# Altium PCB BMS_Rev4.PcbDoc (part 3 of 3)
Units mm, origin at the board's own origin, x right, y up, seen from the top; angles counter-clockwise.
Board outline 63.88 x 34.7 mm, 2 copper layers (Top Layer, Bottom Layer); 62 components, 39 nets, 215 pads, 192 vias.
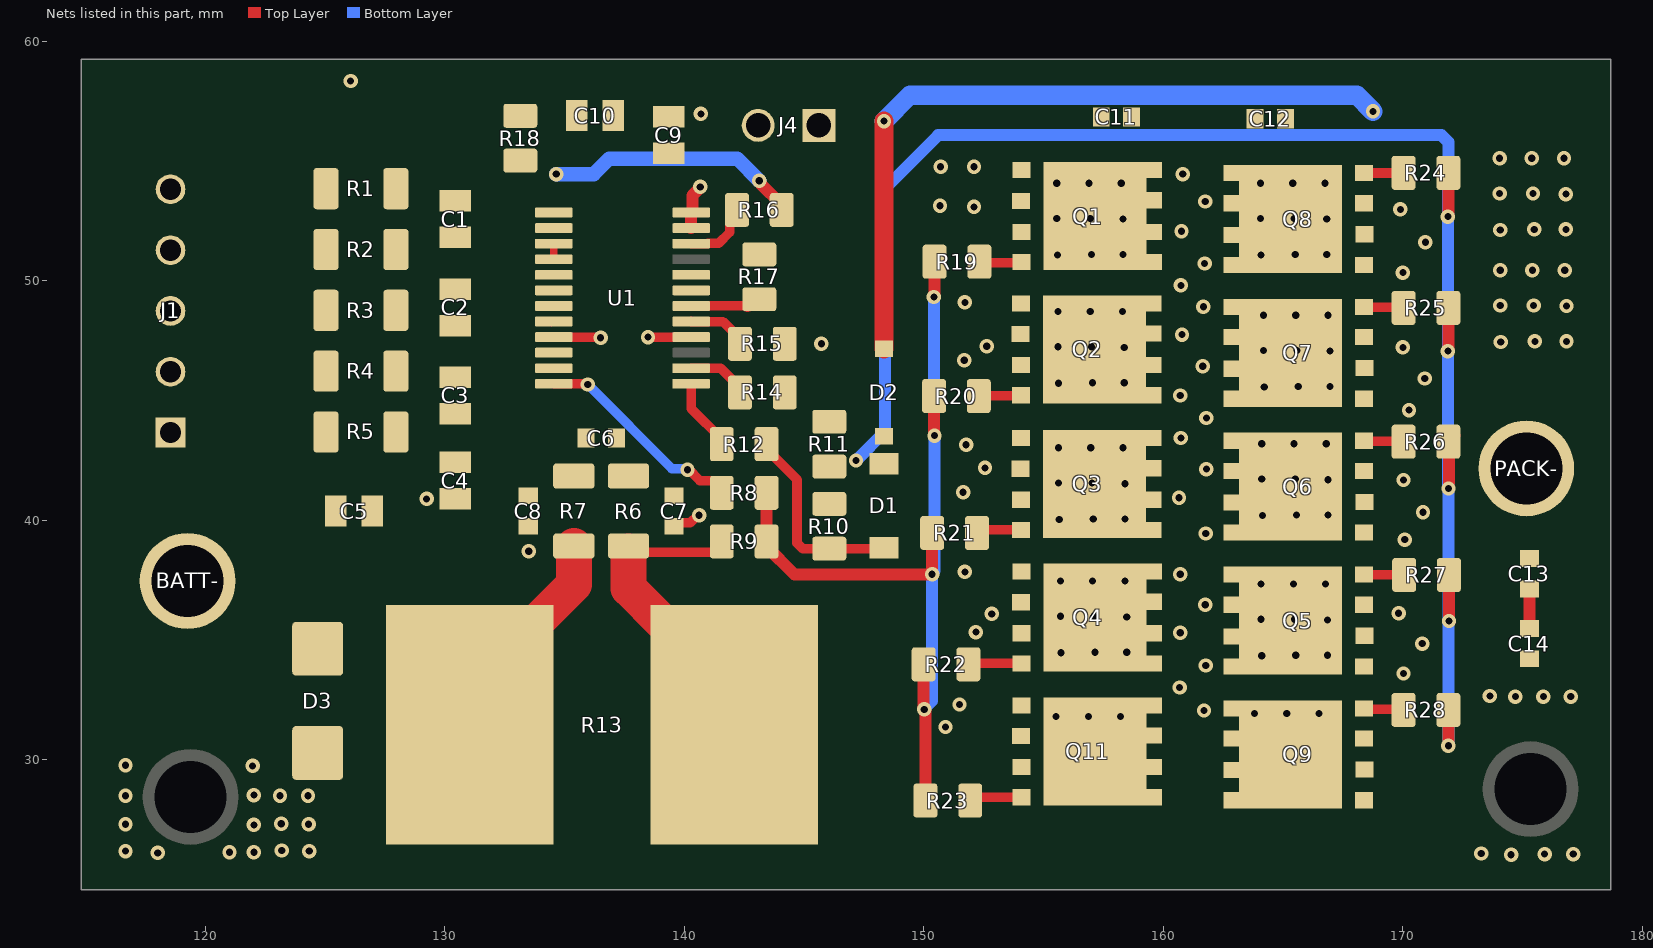
[diagram p2: the nets of this part, all layers, seen from the top]

## Polygon pours and split planes (outlines as drawn) (continued)
NetJ1_4 on Top Layer "NETJ1_4_L01_P029" (solid, pour order 29): 116.942,52.197 cw(c117.003,52.136) 117.003,52.222 125.781,52.222 cw(c125.781,51.487) 126.301,52.007 126.34,51.968 126.34,51.083 cw(c125.472,51.083) 126.086,50.47 cw(c125.963,50.592) 125.963,50.419 116.967,50.419 116.967,52.237 ccw(c116.88,52.237) 116.942,52.299
NetJ1_5 on Top Layer "NETJ1_5_L01_P028" (solid, pour order 28): 116.965,54.762 cw(c117.026,54.701) 117.026,54.788 125.804,54.788 cw(c125.804,54.052) 126.324,54.572 126.363,54.534 126.363,53.648 cw(c125.496,53.648) 126.109,53.035 cw(c125.986,53.158) 125.986,52.984 116.99,52.984 116.99,54.803 ccw(c116.903,54.803) 116.965,54.864
BATT+ on Top Layer "BATT+_L01_P020" (solid, pour order 20): 177.597,34.62 174.422,34.62 172.796,32.995 172.796,25.527 177.597,25.527
BATT+ on Top Layer "BATT+_L01_P026" (solid, pour order 26): 127.406,55.728 127.455,55.776 129.273,55.776 ccw(c128.853,55.882) 129.286,55.882 129.286,56.566 131.122,56.566 cw(c131.122,55.786) 131.674,56.337 131.674,53.34 133.655,51.359 134.163,51.359 134.163,51.74 134.137,51.765 133.756,51.765 132.994,52.527 132.994,53.442 cw(c133.41,53.442) 133.116,53.736 133.94,54.559 134.01,54.559 134.01,55.093 ccw(c132.97,55.093) 133.706,55.829 132.486,55.829 cw(c133.468,56.81) 132.08,56.81 ccw(c130.881,56.307) 130.881,57.607 129.729,57.607 cw(c129.728,60.147) 127.932,58.351 127.584,58.699 125.802,58.699 cw(c125.802,58.873) 125.679,58.75 125.679,57.887 126.042,57.887 cw(c126.043,56.066) 127.33,57.353 cw(c127.147,57.169) 127.406,57.169
BATT+ on Top Layer "BATT+_L01_P019" (solid, pour order 19): 116.764,25.578 cw(c116.764,26.314) 116.027,26.314 116.027,30.48 cw(c117.811,30.48) 116.55,31.741 116.745,31.92 cw(c117.963,29.706) 117.932,32.233 125.654,32.233 125.654,27.661 125.654,25.578
TH1 on Top Layer "TH1_L01_P048" (solid, pour order 48): 144.907,52.476 cw(c144.018,52.476) 144.018,51.587 142.367,51.587 142.342,50.546 141.173,49.809 140.157,49.809 140.157,49.352 141.072,49.352 142.621,50.317 142.646,50.546 144.755,50.673 145.948,50.673 ccw(c145.948,50.796) 146.035,50.709 146.355,51.029 ccw(c145.558,51.826) 146.685,51.826 146.685,57.302 146.492,57.302 cw(c146.492,57.389) 146.431,57.328 144.907,57.328
NetQ1_D on Top Layer "NETQ1_D_L01_P005" (solid, pour order 5): 155.092,54.94 155.092,25.502 167.386,25.502 167.386,54.94
GND on Top Layer "GND_L01_P044" (solid, pour order 44): 146.259,46.901 146.259,47.942 143.922,47.968 143.922,46.901
NetC6_2 on Top Layer "NETC6_2_L01_P043" (solid, pour order 43): 136.804,44.987 ccw(c135.157,44.987) 136.322,46.152 ccw(c136.199,46.029) 136.199,46.203 133.883,46.203 133.883,46.497 cw(c133.97,46.497) 133.909,46.558 136.525,46.558 cw(c136.525,45.148) 137.522,46.145 138.532,45.136 138.532,43.938 ccw(c140.914,43.938) 139.229,42.254 ccw(c138.404,41.429) 138.198,42.577 136.804,42.621
NetC6_2 on Top Layer "NETC6_2_L01_P022" (solid, pour order 22): 139.929,41.554 139.229,42.254 ccw(c138.405,41.431) 138.405,42.596 137.617,42.596 137.617,43.891 136.804,43.891 136.804,41.401 136.804,40.524 ccw(c136.891,40.524) 136.83,40.462 139.785,40.462 ccw(c139.785,40.809) 140.03,40.564 140.03,41.309 ccw(c139.684,41.309)
NetC6_1 on Top Layer "NETC6_1_L01_P021" (solid, pour order 21): 134.163,45.021 136.322,43.866 136.322,40.651 cw(c136.236,40.65) 136.296,40.589 133.193,40.589 cw(c133.193,40.763) 133.071,40.64 cw(c133.132,40.701) 133.045,40.701 133.045,41.808 133.123,41.887 cw(c134.605,40.934) 133.338,42.158 133.274,44.672 133.274,47.219 134.696,47.219 134.722,46.812 134.112,46.825 ccw(c134.014,46.111) 133.579,46.685 133.502,46.495 133.502,46.152 133.528,45.187
GND on Top Layer "GND_L01_P040" (solid, pour order 40): 132.931,37.79 133.972,37.79 133.997,40.127 132.931,40.127
GND on Top Layer "GND_L01_P037" (solid, pour order 37): 128.778,41.427 128.778,40.386 131.115,40.361 131.115,41.427
AVDD on Top Layer "AVDD_L01_P036" (solid, pour order 36): 140.005,54.737 137.211,52.73 139.141,50.495 140.411,50.47 140.382,50.089 138.608,50.089 136.618,52.291 cw(c135.433,54.508) 135.432,51.994 134.214,51.994 134.214,52.426 135.575,52.426 138.455,55.81 139.977,55.81 ccw(c139.943,55.89) 140.005,55.829
NetC5_2 on Top Layer "NETC5_2_L01_P004" (solid, pour order 4): 126.467,37.49 131.765,37.49 ccw(c131.765,38.618) 132.563,37.821 132.537,40.335 132.537,41.961 133.096,42.52 133.096,47.777 133.401,48.082 134.325,48.082 134.439,48.196 134.439,48.365 134.366,48.438 133.274,48.438 132.715,47.879 132.715,47.6 132.715,45.339 131.775,44.399 131.775,40.183 cw(c131.28,40.195) 131.267,39.7 128.981,39.7 128.952,39.653 cw(c130.748,41.449) 128.549,42.721 128.549,44.332 ccw(c128.203,44.332) 128.448,44.577 ccw(c128.08,44.209) 128.08,44.729 127.279,44.729 127.279,43.508 cw(c126.672,43.508) 127.102,43.078 126.531,42.508 ccw(c126.748,42.291) 126.441,42.291 126.441,40.346 ccw(c126.528,40.346) 126.467,40.284
GND on Top Layer "GND_L01_P034" (solid, pour order 34): 136.525,56.159 140.619,56.159 ccw(c140.619,56.8) 141.072,56.347 141.072,57.506 ccw(c140.765,57.506) 140.982,57.722 140.97,57.734 ccw(c140.847,57.612) 140.847,57.785 136.525,57.785
VDD on Top Layer "VDD_L01_P033" (solid, pour order 33): 135.001,54.944 136.067,56.011 ccw(c135.896,56.028) 136.068,56.028 136.068,57.683 132.395,57.683 ccw(c132.395,57.597) 132.334,57.658 132.334,56.439 134.036,56.439 cw(c133.484,55.887) 134.264,55.887 134.264,52.766 ccw(c134.351,52.766) 134.29,52.705 ccw(c134.351,52.766) 134.351,52.68 135.001,52.68
NetC11_2 on Top Layer "NETC11_2_L01_P032" (solid, pour order 32): 158.293,56.007 164.277,56.007 cw(c164.277,55.92) 164.338,55.982 164.338,57.271 ccw(c164.078,57.271) 164.262,57.455 ccw(c164.017,57.21) 164.017,57.556 158.293,57.556
NetD1_2 on Top Layer "NETD1_2_L01_P025" (solid, pour order 25): 148.285,43.917 cw(c148.316,43.886) 148.316,43.929 148.679,43.929 cw(c148.679,43.586) 149.022,43.586 149.022,41.984 cw(c148.819,41.986) 148.819,41.783 146.99,41.783 ccw(c146.99,41.656) 146.863,41.656 146.863,40.284 cw(c146.71,40.284) 146.71,40.132 145.593,40.132 cw(c145.593,40.538) 145.186,40.538 145.186,42.596 cw(c145.415,42.596) 145.415,42.824 147.472,42.824 ccw(c147.472,43.078) 147.726,43.078 147.726,43.739 cw(c147.904,43.739) 147.904,43.917
PACK- on Top Layer "PACK-_L01_P023" (solid, pour order 23): 143.662,46.076 144.533,46.076 cw(c144.533,45.295) 145.085,45.847 cw(c144.594,45.357) 145.288,45.356 145.288,44.806 146.685,44.806 146.685,46.906 cw(c147.379,46.906) 146.888,47.396 cw(c147.011,47.274) 147.011,47.447 148.793,47.447 148.793,46.793 cw(c148.533,46.793) 148.717,46.609 cw(c148.043,47.283) 148.042,46.33 147.345,46.33 147.345,45.09 cw(c145.004,45.09) 146.66,43.434 cw(c146.598,43.495) 146.598,43.409 145.339,43.409 145.339,43.577 ccw(c143.663,41.901) 143.662,44.271
NetC3_1 on Top Layer "NETC3_1_L01_P003" (solid, pour order 3): 129.311,45.568 ccw(c130.047,45.568) 129.527,45.047 129.642,44.933 131.013,44.933 131.064,44.882 131.775,45.593 131.775,47.904 133.02,49.149 134.722,49.149 134.722,48.793 134.671,48.743 133.299,48.743 132.41,47.854 132.41,45.364 131.064,44.018 131.064,42.037 129.718,42.037 129.692,42.012 129.642,42.062 129.642,44.044 128.422,45.263 127.432,45.263 127.432,47.015 127.356,47.092 127.432,47.066 128.448,47.066 129.311,46.203
NetC2_1 on Top Layer "NETC2_1_L01_P002" (solid, pour order 2): 128.451,47.701 cw(c128.438,46.084) 129.591,47.219 129.591,45.466 131.039,45.466 131.267,45.695 131.267,47.701 132.969,49.403 134.599,49.403 134.602,49.4 134.645,49.444 134.645,49.784 132.41,49.784 131.191,48.565 129.616,48.565 128.6,49.581 127.457,49.581 127.432,49.606 127.406,49.581 127.406,47.701
BATT+ on Top Layer "BATT+_L01_P000" (solid, pour order 0): 129.253,56.787 129.261,56.794 131.216,56.794 131.216,56.551 131.198,56.533 131.198,56.014 131.191,56.007 131.191,54 131.191,53.467 132.969,51.689 133.604,51.054 134.239,51.054 134.239,50.673 133.172,50.673 130.886,52.959 127.508,52.959 127.508,54.737 128.714,54.737 ccw(c128.714,55.689) 129.667,55.689 129.641,55.716 129.253,55.716
NetC1_1 on Top Layer "NETC1_1_L01_P001" (solid, pour order 1): 129.667,49.225 129.243,49.65 ccw(c127.446,47.854) 127.446,50.394 127.432,50.394 127.432,52.248 129.743,52.248 129.743,52.324 131.089,52.324 131.089,52.172 132.842,50.419 134.391,50.419 134.391,50.013 132.08,50.013 131.242,49.174 131.191,49.225
GND on Bottom Layer "GND_L02_P014" (solid, pour order 14): 116.713,57.81 146.71,57.81 146.71,36.424 135.509,36.424 135.509,31.394 116.713,31.394
NetC11_1 on Bottom Layer "NETC11_1_L02_P018" (solid, pour order 18): 154.686,55.397 150.647,55.397 149.682,54.432 149.682,36.347 142.57,36.347 142.113,35.89 142.113,30.81 154.559,30.81 154.711,30.963 154.711,55.347
BATT+ on Bottom Layer "BATT+_L02_P012" (solid, pour order 12): 116.129,29.743 115.113,30.759 115.113,58.725 115.189,58.801 126.492,58.801 126.492,58.014 126.416,57.937 116.586,57.937 116.332,57.683 116.332,30.785 173.101,30.785 173.101,33.35 173.076,33.376 174.295,34.595 177.597,34.595 177.597,25.908 177.114,25.425 116.129,25.425
NetQ1_D on Bottom Layer "NETQ1_D_L02_P015" (solid, pour order 15): 155.219,55.601 154.991,55.372 154.991,31.217 167.411,31.217 167.462,31.267 167.462,55.499 155.092,55.499 155.067,55.474
PACK- on Bottom Layer "PACK-_L02_P017" (solid, pour order 17): 167.64,53.797 171.247,53.797 171.399,53.645 171.323,53.569 171.323,30.988 167.64,30.988 167.589,31.039 167.589,53.746
PACK- on Bottom Layer "PACK-_L02_P016" (solid, pour order 16): 172.364,57.556 172.822,57.099 172.822,35.839 177.571,35.839 177.571,57.556